# Altium PCB FU-AM-FU6861Q-B-002-HW-V3.0-20200620.PcbDoc (part 1 of 2)
Units mm, origin at the board's own origin, x right, y up, seen from the top; angles counter-clockwise.
Board outline 105.1 x 87.1 mm, 2 copper layers (TopLayer, BottomLayer); 151 components, 80 nets, 397 pads, 605 vias.
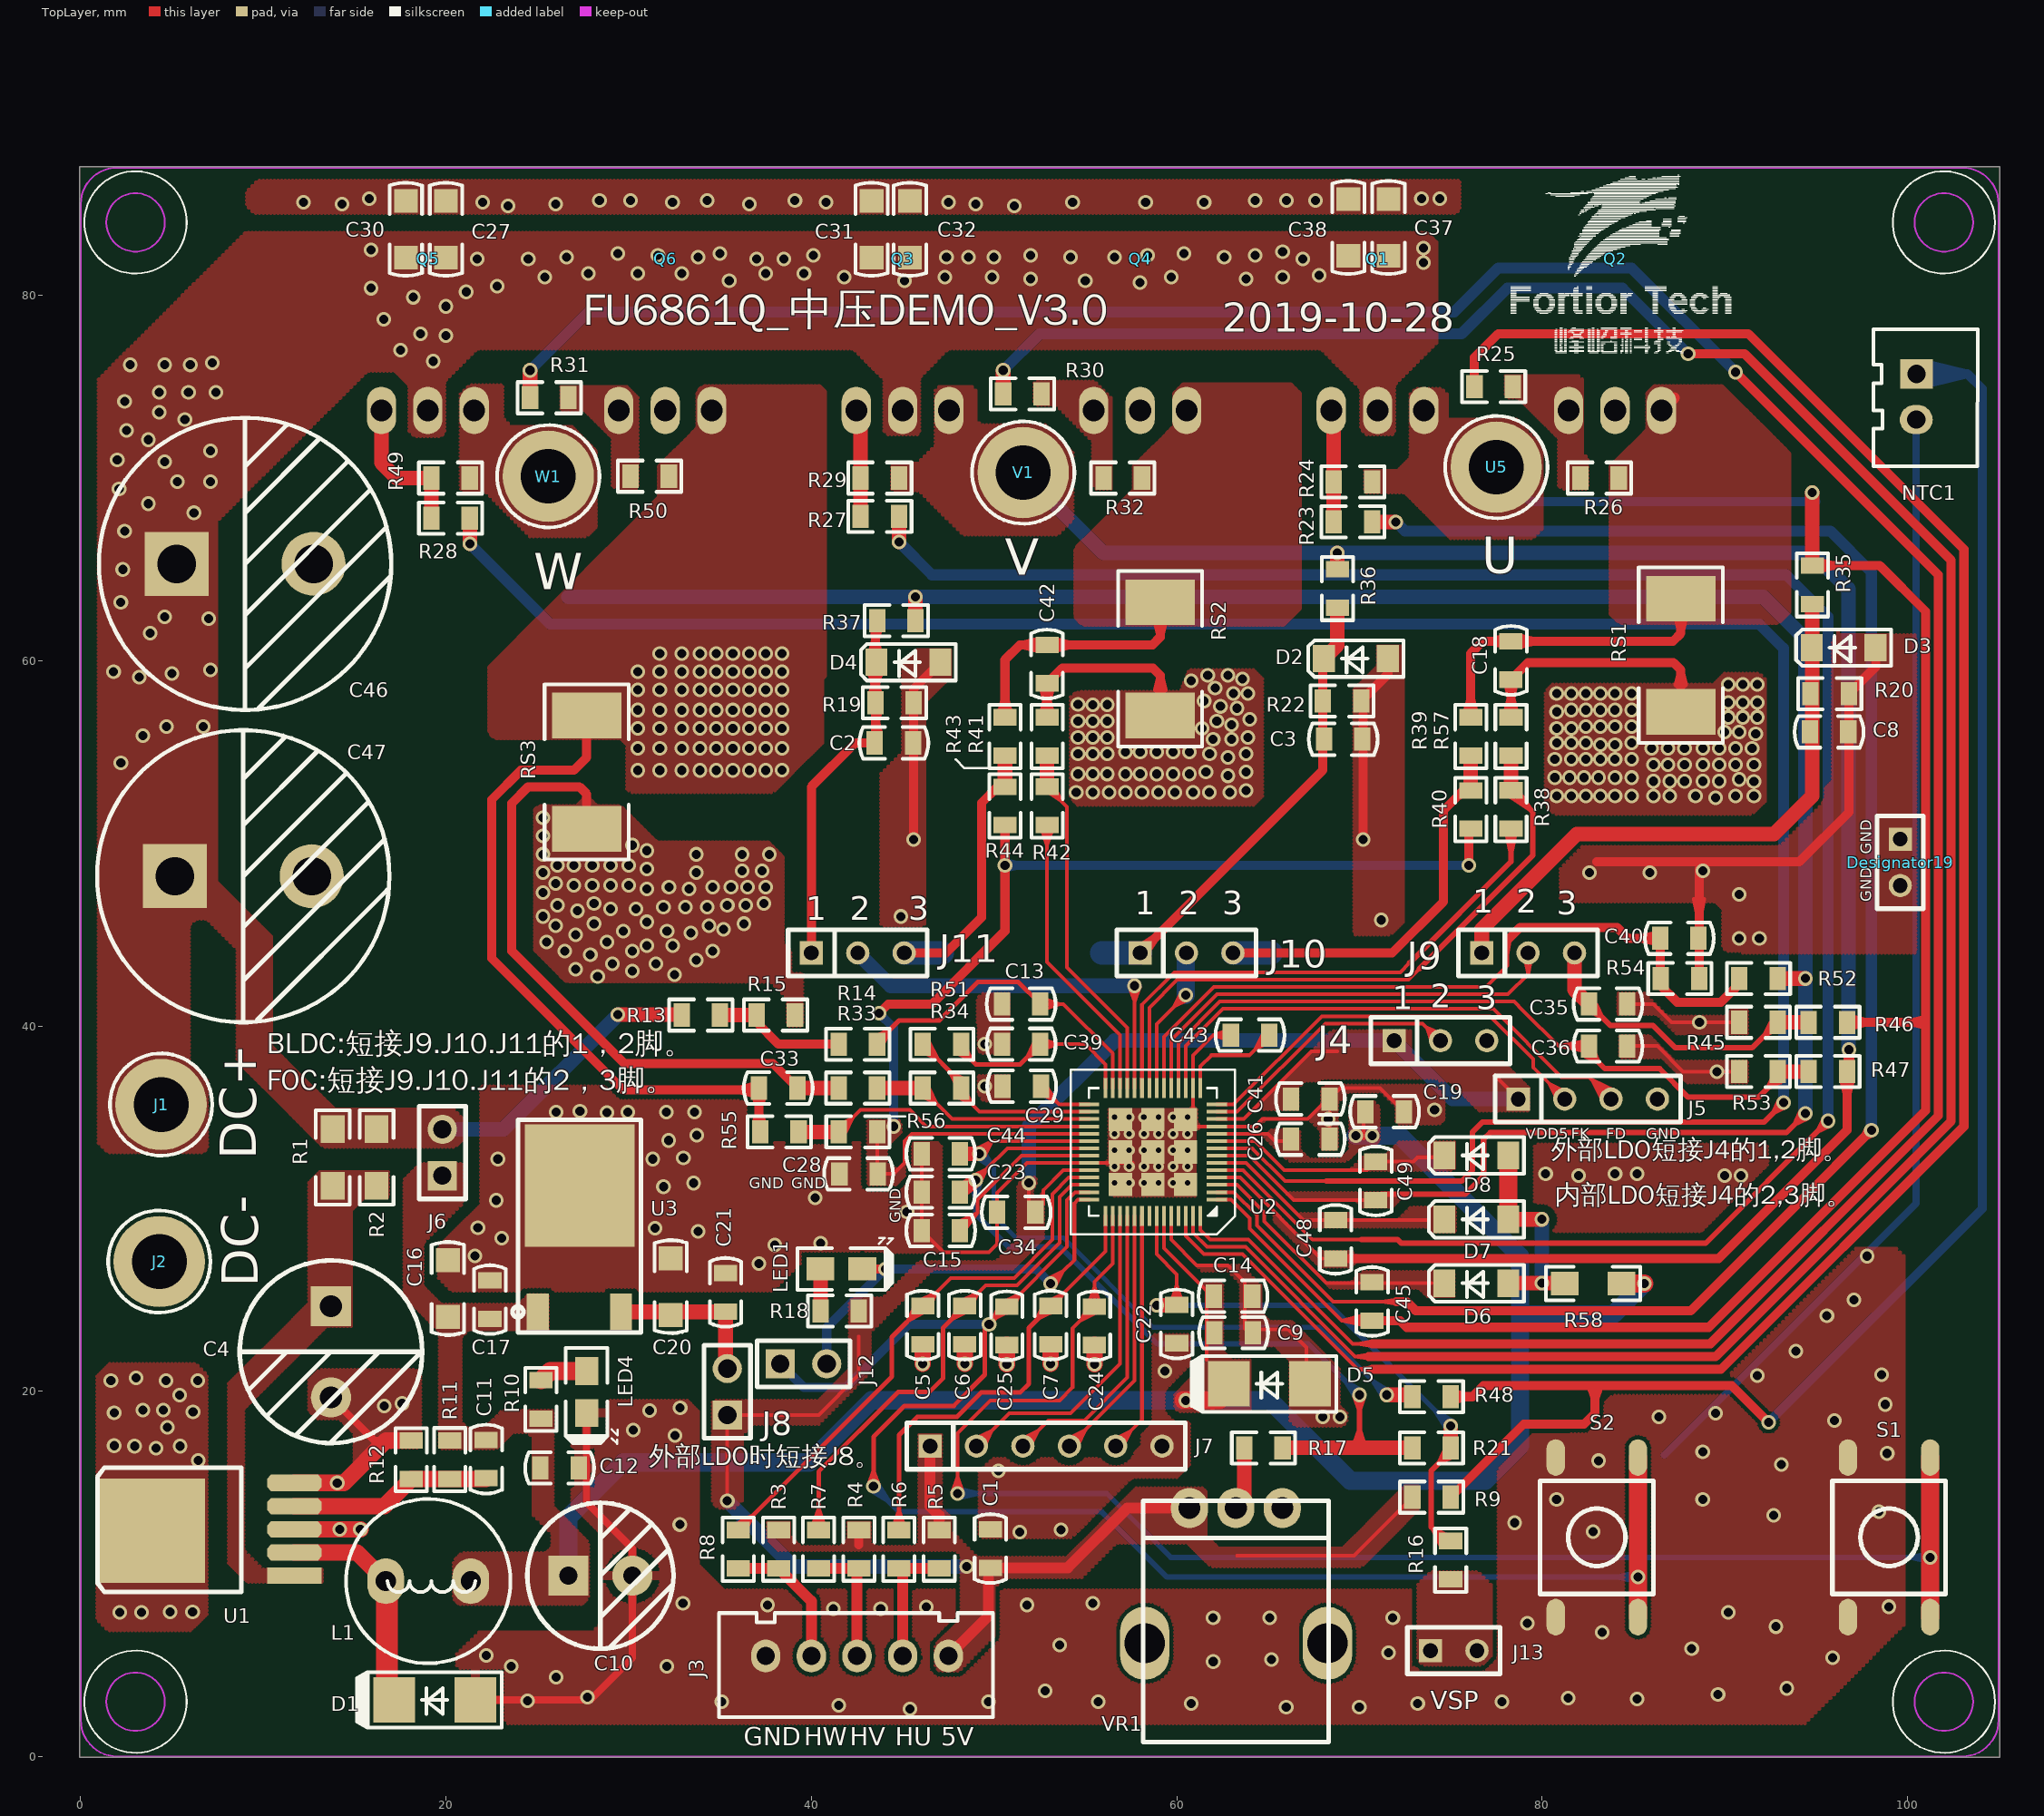
[diagram p0: TopLayer view]
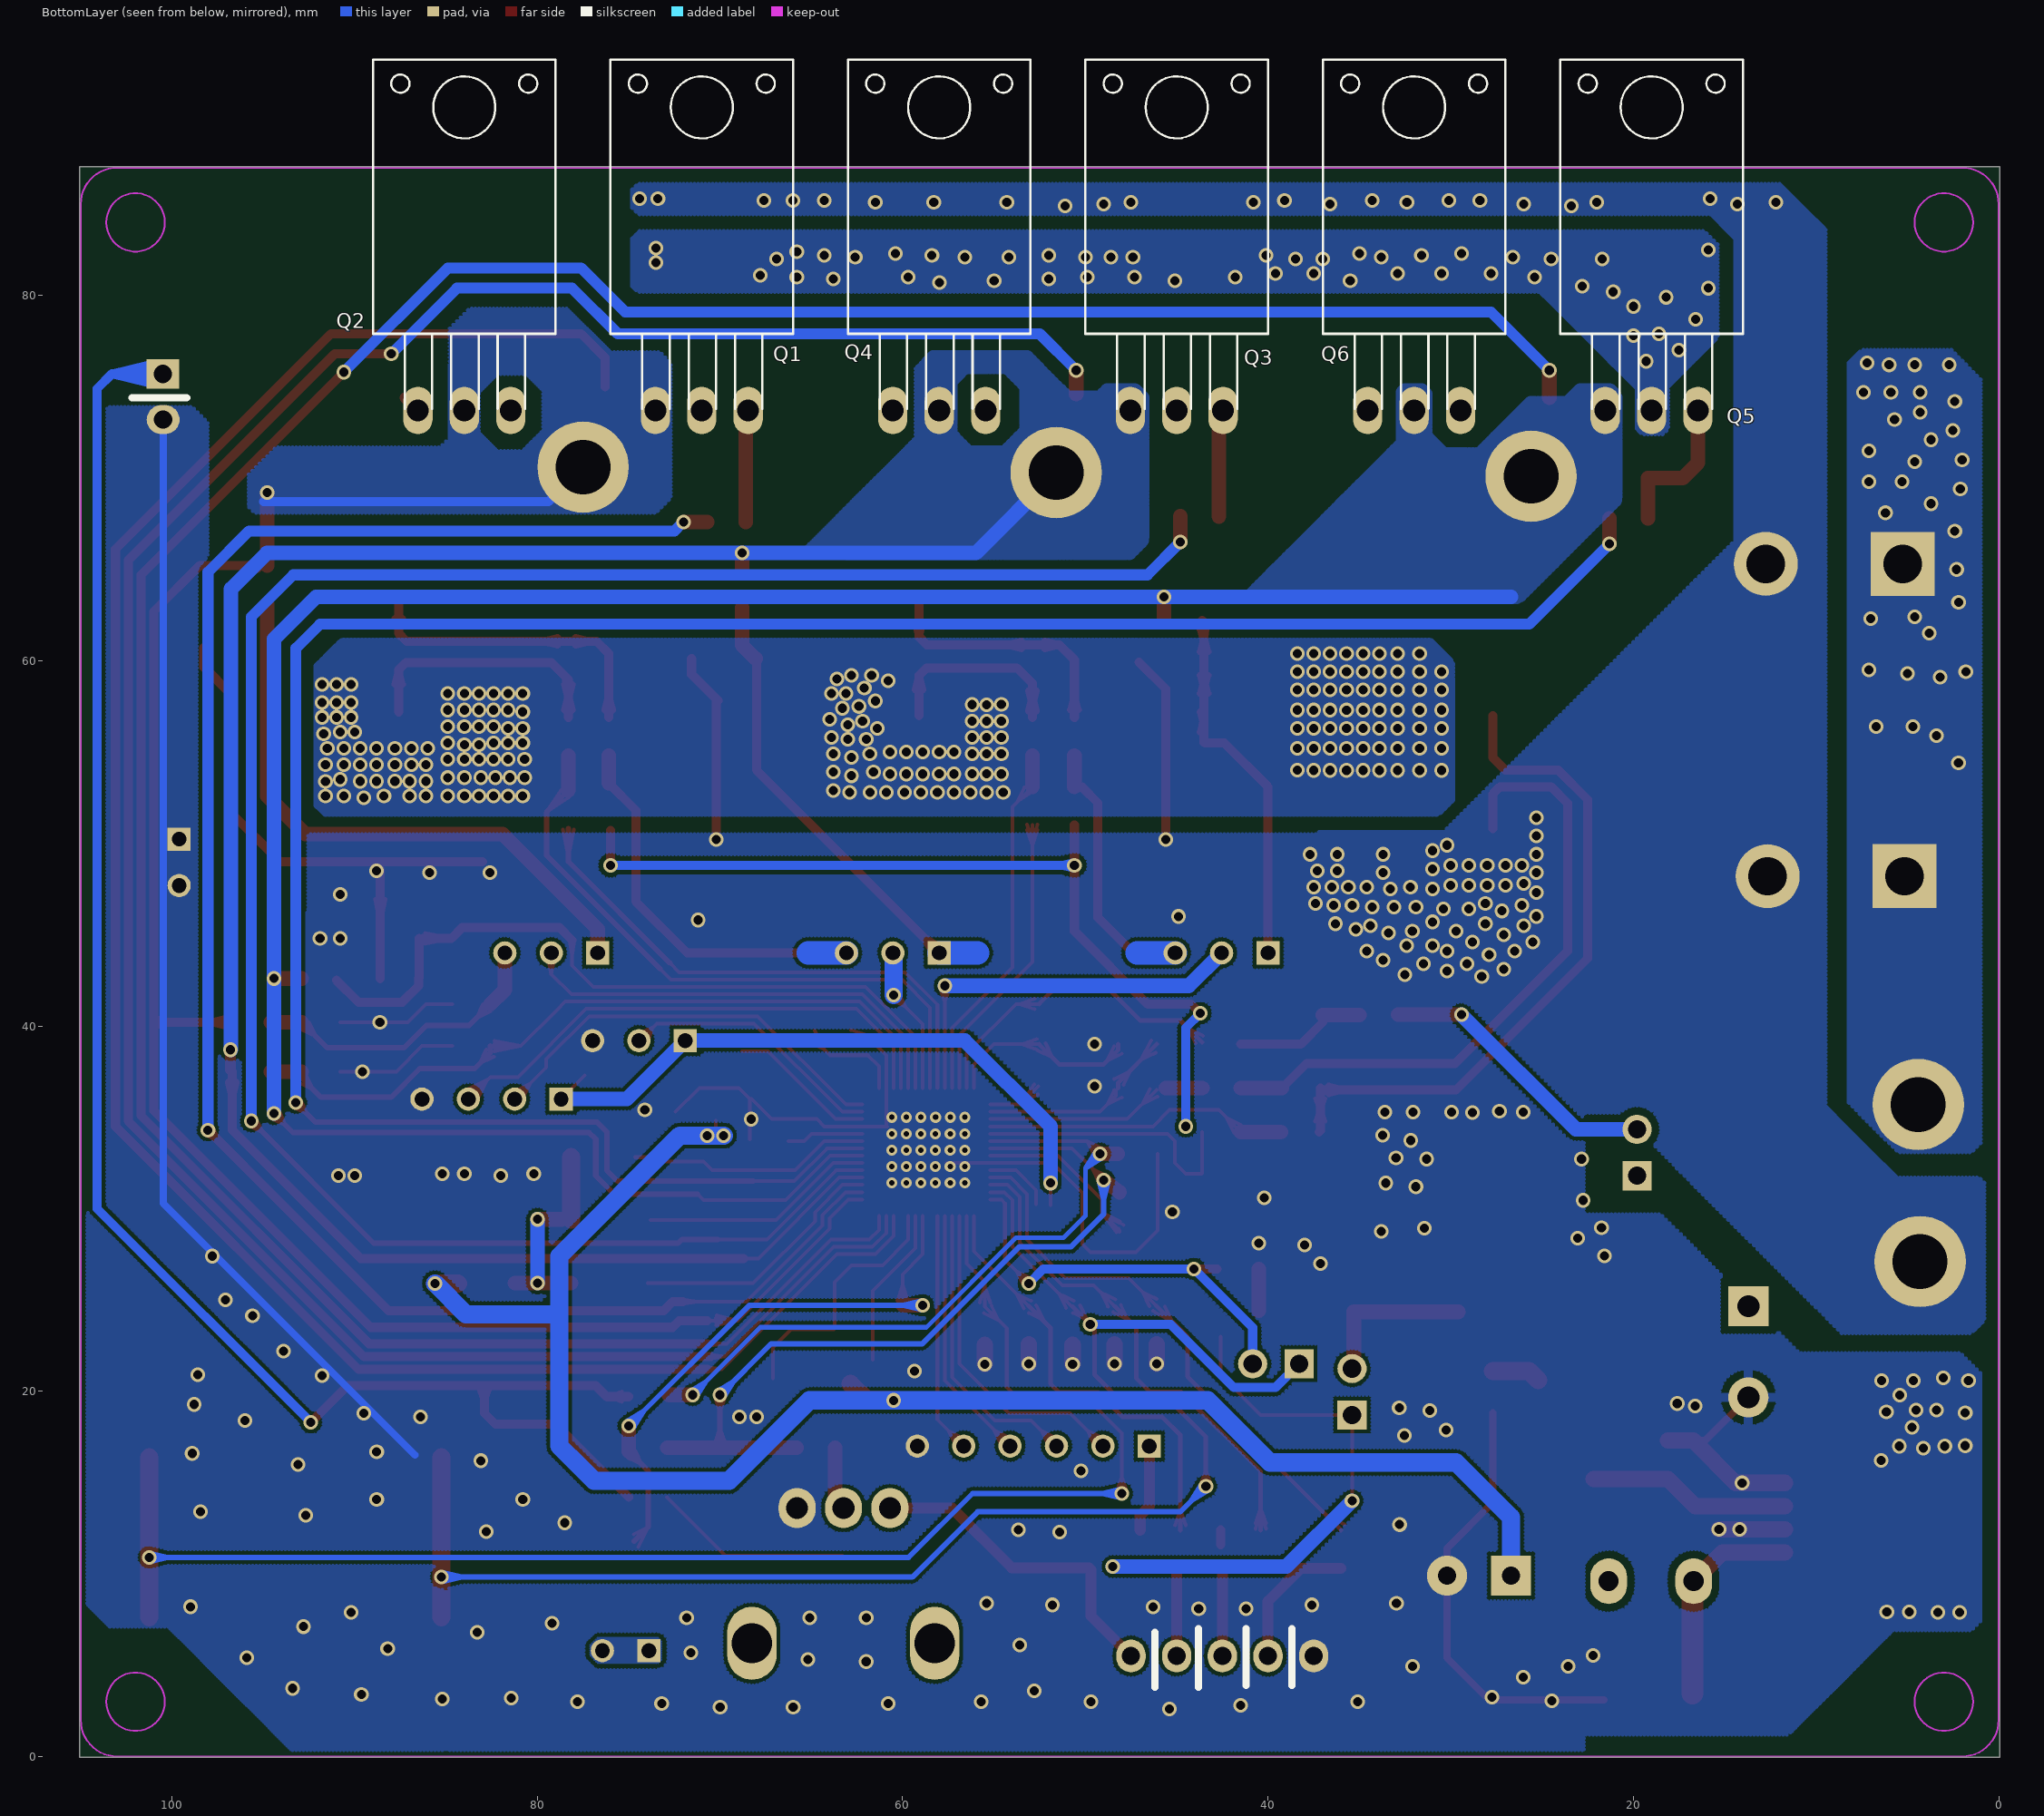
[diagram p1: BottomLayer view, seen from below]

## Layer stack, top to bottom
TopSolder: solder mask 0.0102, Solder Resist, Dk 3.5
TopLayer: signal copper 0.0356
Dielectric1: dielectric 0.32, FR-4, Dk 4.8
BottomLayer: signal copper 0.0356
BottomSolder: solder mask 0.0102, Solder Resist, Dk 3.5

## Board outline
-0.05,-0.05 105.05,-0.05 105.05,87.05 -0.05,87.05

## Design rules (kind name [scope] priority, off if disabled: settings)
AssemblyTestPointUsage [All] p1 off:
AssemblyTestpoint [All] p1 off: testpointundercomponent=TRUE minsize=1.016 maxsize=2.54 preferedsize=1.524 minholesize=0 maxholesize=1.016 preferedholesize=0.813 testpointgrid=0.025 usegrid=TRUE gridtolerance=0 allowsidetop=TRUE allowsidebottom=TRUE
Clearance [All] p1: gap=0.2 ignorepadtopadclearanceinfootprint=FALSE except(0: Arc-Hole Track-Hole SMDPad-Hole THPad-Hole Via-Hole Fill-Hole Poly-Hole Region-Hole Text-Hole)
ComponentClearance [All] p1 off: gap=0.254 collisioncheckmode=3 verticalgap=0.254 showdistances=FALSE
FabricationTestPointUsage TestPointUsage [All] p1 off: valid=0 allowmultiple=FALSE
FabricationTestpoint Testpoint [All] p1 off: side=3 testpointundercomponent=TRUE minsize=1.016 maxsize=2.54 preferedsize=1.524 minholesize=0.508 maxholesize=1.016 preferedholesize=0.813 testpointgrid=0.025 allowsidetop=TRUE allowsidebottom=TRUE usegrid=TRUE gridtolerance=0
FanoutControl Fanout_Small [All] p1 off: bgadir=Out bgaviamode=Centered fanoutstyle=Auto fanoutdirection=Alternating viagrid=0.025 // Protel DXP Scope 1 Expression Was: (CompPinCount < 5)   Fanout_Small (Default Rule)
FanoutControl Fanout_Default [All] p2: bgadir=Out bgaviamode=Centered fanoutstyle=Auto fanoutdirection=Alternating viagrid=0.025 // Fanout_Default (Default Rule)
FanoutControl Fanout_SOIC [All] p3 off: bgadir=Out bgaviamode=Centered fanoutstyle=Auto fanoutdirection=Alternating viagrid=0.025 // Protel DXP Scope 1 Expression Was: IsSOIC   Fanout_SOIC (Default Rule)
FanoutControl Fanout_BGA [All] p4 off: bgadir=Out bgaviamode=Centered fanoutstyle=Auto fanoutdirection=Alternating viagrid=0.025 // Protel DXP Scope 1 Expression Was: IsBGA   Fanout_BGA (Default Rule)
FanoutControl Fanout_LCC [All] p5 off: bgadir=Out bgaviamode=Centered fanoutstyle=Auto fanoutdirection=Alternating viagrid=0.025 // Protel DXP Scope 1 Expression Was: IsLCC   Fanout_LCC (Default Rule)
Height [All] p1 off: minheight=0 maxheight=25.4 prefheight=12.7
HoleSize [All] p1 off: absolutevalues=TRUE maxlimit=2.54 minlimit=0.025 maxpercent=80.000 minpercent=20.000
HoleToHoleClearance [All] p1 off: gap=0.254 allowstackedmicrovias=TRUE
LayerPairs [All] p1 off: enforce=TRUE
MinimumSolderMaskSliver [All] p1 off: minsoldermaskwidth=0.254
NetAntennae [All] p1 off: netantennaetolerance=0
PolygonConnect PolygonConnect_1 [isvia] p1: connectstyle=Direct reliefconductorwidth=0.508 reliefentries=4 polygonreliefangle="90 Angle" airgapwidth=0.254 // Protel DXP Scope 1 Expression Was: isvia
PolygonConnect [All] p2: connectstyle=Direct reliefconductorwidth=0.5 reliefentries=4 polygonreliefangle="90 Angle" airgapwidth=0.254
RoutingVias [All] p1: holewidth=0.406 width=0.711 viastyle="Through Hole" minholewidth=0.4 minwidth=0.7 maxholewidth=0.711 maxwidth=1.27
SilkToSilkClearance [All] p1 off: silktosilkclearance=0.254
SilkToSolderMaskClearance SilkscreenOverComponentPads [IsPad] p1 off: minsilkscreentomaskgap=0.254 clearancetoexposedcopper=TRUE
SolderMaskExpansion [All] p1: expansion=0.102 istentingtop=FALSE
Width [All] p1: maxlimit=5 minlimit=0.2 preferedwidth=0.5
12 further rules are at their usual default settings.

## Components (designator, comment, footprint, x,y, rotation, side; value= is the part's Value field where it differs from the comment)
C1 "0.1uF/25V" C0805 49.8,12.4 r270 top
C2 "1nF" C0805 43.5,55.5 r0 top
C3 "1nF" C0805 68.1,55.7 r0 top
C4 "100uF/100V" CE5-10/16 13.7,24.7 r270 top
C5 "2.2nF/16V" C0805 46.1,22.6 r90 top
C6 "2.2nF/16V" C0805 48.4,22.6 r90 top
C7 "2.2nF/16V" C0805 53.1,22.6 r90 top
C8 "1nF" C0805 94.7,56.1 r0 top
C9 "0.1uF/25V" C0805 62.1,23.2 r0 top
C10 "220uF/25V" CE3.5-8/12 26.7,9.9 r0 top
C11 "33nF" C0805 22.2,17.3 r270 top
C12 "0.1uF/25V" C0805 25.2,15.8 r0 top
C13 "0.1uF/16V" C0805 52.5,41.2 r180 top
C14 "10uF" C0805 64.1,25.2 r180 top
C15 "1uF" C0805 48.1,28.8 r180 top
C16 "10uF/25V" C1206 20.1,24.1 r90 top
C17 "0.1uF/25V" C0805 22.4,24 r90 top
C18 "100pF/16V" C0805 78.3,59 r90 top
C19 "10uF" C0805 72.4,35.3 r180 top
C20 "10uF/16V" C1206 32.3,24.2 r90 top
C21 "0.1uF/16V" C0805 35.3,24.4 r90 top
C22 "100pF" C0805 60,24.7 r270 top
C23 "0.1uF" C0805 48.1,30.9 r180 top
C24 "0.1uF" C0805 55.5,24.6 r270 top
C25 "0.1uF" C0805 50.7,24.6 r270 top
C26 "0.1uF/25V" C0805 66.3,33.8 r0 top
C27 "1uF/100V" C1206 20,82.1 r90 top
C28 "1uF" C0805 43.6,31.9 r180 top
C29 "0.1uF" C0805 50.5,36.7 r0 top
C30 "100nF/100V" C1206 17.8,82.1 r90 top
C31 "1uF/100V" C1206 43.3,82.1 r90 top
C32 "100nF/100V" C1206 45.4,82.1 r90 top
C33 "100pF" C0805 39.2,36.6 r180 top
C34 "1uF" C0805 50.2,29.8 r0 top
C35 "1nF" C0805 82.6,41.2 r0 top
C36 "1nF" C0805 82.6,38.9 r0 top
C37 "100nF/100V" C1206 71.6,82.2 r90 top
C38 "1uF/100V" C1206 69.4,82.2 r90 top
C39 "4.7uF" C0805 52.5,39 r180 top
C40 "1nF" C0805 86.5,44.8 r0 top
C41 "1uF" C0805 66.3,36 r0 top
C42 "100pF/16V" C0805 52.9,58.8 r90 top
C43 "1uF" C0805 63,39.5 r0 top
C44 "0.1uF/25V" C0805 48.1,33 r180 top
C45 "10uF/25V" C0805 70.7,23.9 r90 top
C46 "100uF/100V" CE7.5-16/25 9,65.3 r0 top
C47 "100uF/100V" CE7.5-16/25 8.9,48.2 r0 top
C48 "10uF/25V" C0805 68.7,27.3 r90 top
C49 "10uF/25V" C0805 70.899,30.5 r90 top
D1 "SS110" SMA 21.6,3.1 r180 top
D2 "ZMM5.1" SOD-123#1 71.6,60.1 r180 top
D3 "ZMM5.1" SOD-123#1 98.3,60.7 r180 top
D4 "ZMM5.1" SOD-123#1 47.1,59.9 r180 top
D5 "SMAJ18CTVS18V)" SMA 67.3,20.4 r180 top
D6 "IN4148W" SOD-123#2 78.2,25.9 r180 top
D7 "IN4148W" SOD-123#2 78.2,29.4 r180 top
D8 "IN4148W" SOD-123#2 78.2,32.9 r180 top
Designator19 "Comment" SIP2-2.54#1 99.613,50.232 r270 top
J1 "100V" TP 4.4,35.7 r0 top
J2 "GND" TP 4.3,27.1 r0 top
J3 "HALL" XH-5P-2.54 47.5,5.5 r180 top
J4 "CON3" SIP3-2.54 71.9,39.2 r0 top
J5 "JTAG" SIP4-2.54 78.7,36 r0 top
J6 "VDD15" SIP2-2.54#2 19.8,31.8 r90 top
J7 "CON6" sip6-2.54 46.5,17 r0 top
J8 "VDD5" SIP2-2.54#2 35.4,18.7 r90 top
J9 "CON3" SIP3-2.54 76.7,44 r0 top
J10 "CON3" SIP3-2.54 58,44 r0 top
J11 "CON3" SIP3-2.54 40,44 r0 top
J12 "CON2" SIP2-2.54#2 38.3,21.5 r0 top
J13 "VSP" SIP2-2.54#1 73.9,5.8 r0 top
L1 "100uH/1A" L4.5-9 16.7,9.6 r0 top
LED1 "RED" LED0805 40.5,26.7 r0 top
LED4 "GREEN" LED0805 27.7,21.1 r270 top
NTC1 "10K/1%" XH-2P-2.54 100.5,75.7 r270 top
Q1 "150A/100V" TO-220AB-W 71,82 r0 top locked
Q2 "150A/100V" TO-220AB-W 84,82 r0 top locked
Q3 "150A/100V" TO-220AB-W 45,82 r0 top locked
Q4 "150A/100V" TO-220AB-W 58,82 r0 top locked
Q5 "150A/100V" TO-220AB-W 19,82 r0 top locked
Q6 "150A/100V" TO-220AB-W 32,82 r0 top locked
R1 "200R/1%" R1206 13.8,32.8 r270 top
R2 "200R/1%" R1206 16.2,32.8 r270 top
R3 "3.3K" R0805 38.2,10.3 r90 top
R4 "3.3K" R0805 42.6,10.3 r90 top
R5 "3.3K" R0805 47,10.3 r90 top
R6 "100R" R0805 44.8,12.4 r270 top
R7 "100R" R0805 40.4,12.4 r270 top
R8 "100R" R0805 36,12.4 r270 top
R9 "10K/1%" R0805 72.9,14.2 r0 top
R10 "10K/1%" R0805 25.2,18.5 r90 top
R11 "30K" R0805 20.2,15.2 r90 top
R12 "3.3K" R0805 18.1,17.3 r270 top
R13 "20K/1%" R0805 32.9,40.6 r0 top
R14 "1K" R0805 43.6,39 r180 top
R15 "1K/1%" R0805 37,40.6 r0 top
R16 "100R" R0805 75,9.7 r90 top
R17 "1K" R0805 63.7,16.9 r0 top
R18 "3K/1%" R0805 42.6,24.4 r180 top
R19 "1K" R0805 43.5,57.7 r0 top
R20 "1K" R0805 94.7,58.2 r0 top
R21 "1K" R0805 75,16.9 r180 top
R22 "1K" R0805 68,57.8 r0 top
R23 "10R" R0805 70.7,67.6 r180 top
R24 "47K" R0805 70.7,69.8 r180 top
R25 "10R" R0805 76.3,75 r0 top
R26 "47K" R0805 84.2,70 r180 top
R27 "10R" R0805 44.8,67.9 r180 top
R28 "10R" R0805 21.3,67.8 r180 top
R29 "47K" R0805 44.8,70 r180 top
R30 "10R" R0805 50.5,74.6 r0 top
R31 "10R" R0805 24.6,74.4 r0 top
R32 "47K" R0805 58.1,70 r180 top
R33 "2K/1%" R0805 43.6,36.6 r180 top
R34 "20K/1%" R0805 48.2,36.6 r180 top
R35 "20K" R0805 94.8,63.1 r90 top
R36 "20K" R0805 68.8,62.9 r90 top
R37 "20K" R0805 43.6,62.2 r0 top
R38 "20K/1%" R0805 78.3,50.8 r90 top
R39 "2K/1%" R0805 76.1,54.8 r90 top
R40 "20K/1%" R0805 76.1,52.9 r270 top
R41 "2K/1%" R0805 52.9,54.8 r90 top
R42 "20K/1%" R0805 52.9,51 r90 top
R43 "2K/1%" R0805 50.6,54.8 r90 top
R44 "20K/1%" R0805 50.6,53.1 r270 top
R45 "1.5K" R0805 92.9,40.2 r180 top
R46 "30K" R0805 94.6,40.2 r0 top
R47 "30K" R0805 94.6,37.5 r0 top
R48 "1K/1%" R0805 75,19.7 r180 top
R49 "47K" R0805 21.3,70 r180 top
R50 "47K" R0805 32.2,70.1 r180 top
R51 "20K/1%" R0805 48.2,39 r180 top
R52 "30K" R0805 90.8,42.6 r0 top
R53 "1.5K" R0805 92.9,37.5 r180 top
R54 "1.5K" R0805 86.5,42.6 r0 top
R55 "2K/1%" R0805 39.3,34.2 r180 top
R56 "20K/1%" R0805 41.5,34.2 r0 top
R57 "2K/1%" R0805 78.3,54.8 r90 top
R58 "10R" R1206 82.8,25.9 r0 top
RS1 "0R005/1% 2W" R2512 87.6,57.2 r90 top
RS2 "0R005/1% 2W" R2512 59.1,57 r90 top
RS3 "0R002/1% 2W" R2512 27.7,50.8 r90 top
S1 "SW SPST" SW-6/6 99,12 r90 top
S2 "SW SPST" SW-6/6 83,12 r90 top
U1 "XL7015" TO-252-5L 11.7,9.9 r90 top
U2 "FU6861Q" QFN56 62.2,30.5 r180 top
U3 "78M05" TO-252-3L 27.3,27.8 r0 top
U5 "U" TP 77.5,70.6 r0 top
V1 "V" TP 51.6,70.3 r0 top
VR1 "" VR6 60.7,13.6 r0 top
W1 "W" TP 25.6,70.1 r0 top

## Footprints (in the part's own frame and the unit in brackets; to place one, negate y for a bottom-side part, rotate by r counter-clockwise, add the part's x,y. Pads: shape width x height; smd on the part's side, far side on the other; paste and mask are expansions set on the pad)
C0805 [mm]
  rect 0.9x1.27 smd mask+0.051: 1(-0.034,0) 2(2.066,0)
  silkscreen extent -0.87,-0.86 2.9,0.86
C1206 [mm]
  rect 1.3x1.3 smd mask+0.051: 1(-0.026,0) 2(3.074,0)
  silkscreen extent -1.02,-0.89 4.07,0.89
CE3.5-8/12 [mm]
  rect 2.2x2.2 hole 1: 1(0,0)
  round 2.2 hole 1: 2(3.5,0)
  silkscreen extent -2.25,-4 5.75,4
CE5-10/16 [mm]
  rect 2.2x2.2 hole 1.2: 1(0.04,0)
  round 2.2 hole 1.2: 2(5.04,0)
  silkscreen extent -2.46,-5 7.54,5
CE7.5-16/25 [mm]
  rect 3.5x3.5 hole 2.1: 1(-3.75,0)
  round 3.5 hole 2.1: 2(3.75,0)
  silkscreen extent -8,-8 8,8
L4.5-9 [mm]
  oval 2x2.5 hole 1.1: 1(0,0) 2(4.65,0)
  silkscreen extent -2.17,-4.5 6.82,4.5
LED0805 [mil]
  rect 60x50 smd mask+2: 1(0,0) 2(90,0)
  silkscreen extent -50,-45 156,67
QFN56 [mm]
  rect 1.27x1.27 smd: 0(1.722,-0.822) 0(1.722,-4.378) 0(1.722,-2.6) 0(3.5,-2.6) 0(3.5,-0.822) 0(3.5,-4.378) 0(5.278,-2.6) 0(5.278,-0.822) 0(5.278,-4.378)
  rect 1.1x0.2 smd: 1(0,0) 2(0,-0.4) 3(0,-0.8) 4(0,-1.2) 5(0,-1.6) 6(0,-2) 7(0,-2.4) 8(0,-2.8) 9(0,-3.2) 10(0,-3.6) 11(0,-4) 12(0,-4.4) 13(0,-4.8) 14(0,-5.2) 29(7,-5.2) 30(7,-4.8) 31(7,-4.4) 32(7,-4) 33(7,-3.6) 34(7,-3.2) 35(7,-2.8) 36(7,-2.4) 37(7,-2) 38(7,-1.6) 39(7,-1.2) 40(7,-0.8) 41(7,-0.4) 42(7,0)
  rect 0.2x1.1 smd: 15(0.9,-6.1) 16(1.3,-6.1) 17(1.7,-6.1) 18(2.1,-6.1) 19(2.5,-6.1) 20(2.9,-6.1) 21(3.3,-6.1) 22(3.7,-6.1) 23(4.1,-6.1) 24(4.5,-6.1) 25(4.9,-6.1) 26(5.3,-6.1) 27(5.7,-6.1) 28(6.1,-6.1) 43(6.1,0.9) 44(5.7,0.9) 45(5.3,0.9) 46(4.9,0.9) 47(4.5,0.9) 48(4.1,0.9) 49(3.7,0.9) 50(3.3,0.9) 51(2.9,0.9) 52(2.5,0.9) 53(2.1,0.9) 54(1.7,0.9) 55(1.3,0.9) 56(0.9,0.9)
  silkscreen extent -1,-7.1 8,1.9
R0805 [mm]
  rect 0.9x1.27 smd: 1(0.001,-0.001) 2(2.101,-0.001)
  silkscreen extent -0.68,-0.86 2.79,0.86
R1206 [mm]
  rect 1.5x1.3 smd: 1(-1.55,0) 2(1.55,0)
  silkscreen extent -2.58,-0.93 2.58,0.92
R2512 [mm]
  rect 2.5x3.8 smd mask+0.051: 1(0,0) 2(6.196,0)
  silkscreen extent -1.69,-2.29 7.91,2.31
SIP2-2.54#1 [mil]
  rect 50x50 hole 32: 1(0,0)
  round 50 hole 32: 2(100,0)
  silkscreen extent -50,-50 150,50
SIP2-2.54#2 [mil]
  rect 62.99x62.99 hole 39.37: 1(0,0)
  round 62.99 hole 39.37: 2(100,0)
  silkscreen extent -50,-50 150,50
SIP3-2.54 [mil]
  rect 50x50 hole 32: 1(0,0)
  round 50 hole 32: 2(100,0) 3(200,0)
  silkscreen extent -50,-50 250,50
SIP4-2.54 [mil]
  rect 50x50 hole 32: 1(0,0)
  round 50 hole 32: 2(100,0) 3(200,0) 4(300,0)
  silkscreen extent -50,-50 350,50
sip6-2.54 [mil]
  rect 50x50 hole 32: 1(0,0)
  round 50 hole 32: 2(100,0) 3(200,0) 4(300,0) 5(400,0) 6(500,0)
  silkscreen extent -50,-50 550,50
SMA [mil]
  rect 90x98 smd mask+2: 1(0,0) 2(175,0)
  silkscreen extent -57,-60 255,60
SOD-123#1 [mm]
  rect 1.2x1.5 smd: 1(0.04,-0.013) 2(3.54,-0.013)
  silkscreen extent -0.81,-1.01 4.39,0.99
SOD-123#2 [mm]
  rect 1.2x1.5 smd: A(0.04,-0.013) K(3.54,-0.013)
  silkscreen extent -0.81,-1.01 4.39,0.99
SW-6/6 [mm]
  oval 2x1 smd: 1(-4.37,-2.25) 1(4.37,-2.25) 2(-4.37,2.25) 2(4.37,2.25)
  silkscreen extent -3.1,-3.1 3.1,3.1
TO-220AB-W [mm]
  round 0.5 on Top Overlay: 0(0,8.3)
  oval 1.6x2.6 hole 1.2: 1(-2.54,-8.3) 2(0,-8.3) 3(2.54,-8.3)
TO-252-3L [mm]
  rect 6x6.7 smd: GND(0.02,3.457)
  rect 1.2x2 smd: IN(-2.28,-3.457) OUT(2.28,-3.457)
  silkscreen extent -3.66,-4.58 3.36,7.06
TO-252-5L [mm]
  rect 0.9x3 smd: 1(0,0)
  oct 0.9x3 smd: 2(1.27,0) 3(2.54,0) 4(3.81,0) 5(5.08,0)
  rect 5.715x6 smd: 3(2.469,7.898)
  silkscreen extent -0.89,2.91 5.91,10.79
TP [mm]
  round 5 hole 3: 1(0,0)
  silkscreen extent -2.8,-2.8 2.8,2.8
VR6 [mm]
  oval 2.032x2.2 hole 1.2: 1(0,0) 3(5.08,0) W(2.54,0)
  oval 2.7x4 hole 2.2: 4(7.55,-7.4) 5(-2.45,-7.4)
  silkscreen extent -2.54,-12.81 7.62,0.4
XH-2P-2.54 [mm]
  rect 1.6x1.8 hole 1: 1(0,0)
  oval 1.6x1.8 hole 1: 2(2.5,-0.01)
  silkscreen extent -2.44,-2.37 5.06,3.35
XH-5P-2.54 [mm]
  oval 1.6x1.8 hole 1: 1(0,0) 2(2.5,-0.01) 3(5,0) 4(7.5,0) 5(10,0)
  silkscreen extent -2.44,-2.35 12.56,3.35

## Part data
C1 C2 C3 C5 C6 C7 C8 C11 C12 C13 C14 C15 C17 C18 C19 C24 C25 C27 C28 C29 C30 C31 C32 C33 C34 C35 C36 C37 C38 C39 C40 C41 C42 C43 C46 C47: library part CAP, "Capacitor"
C4 C16: library part ELECTRO1, "Electrolytic Capacitor"
C9 C22 C23 C26 C44: library part CAP-CC, "Capacitor"
C10: library part "Cap Pol1", "Polarized Capacitor (Radial)"
C20: library part ELECTRO1
C21 C45 C48 C49: library part CAP-CC(SMD), "Capacitor"
D1: library part DIODE, "Diode"
D2 D3 D4: library part ZENER3, "Zener Diode"
D5: library part TVS1, "Zener Diode"
D6 D7 D8: library part 1N4004, "Diode"
J1 J2 U5 V1 W1: library part CON1, "Connector"
J3: library part CON5, "Connector"
J4 J7 J9 J10 J11 J12: "Connector"
J5: library part CON4, "Connector"
J6 J8: library part CON2, "Connector"
L1: library part INDUCTOR
LED1 LED4: library part LED
NTC1 R1 R2 R3 R4 R5 R6 R7 R8 R9 R10 R11 R12 R13 R14 R15 R16 R17 R18 R21 R23 R24 R25 R26 R27 R28 R29 R30 R31 R32 R33 R34 R38 R39 R40 R41 R42 R43 R44 R48 R49 R50 R51 R55 R56 R57 R58 RS1 RS2 RS3: library part RES(SMD)
Q1 Q2 Q3 Q4 Q5 Q6: library part "MOSFET N(GDS)"
R19 R20 R22 R35 R36 R37 R45 R46 R47 R52 R53 R54: library part RES-SMD, "RES"
VR1: library part RV-3296, "Potentiometer"

## Via types
v1: diameter 0.8, hole 0.5, TopLayer to BottomLayer, tented both sides, 575 vias
v2: diameter 0.6, hole 0.3, TopLayer to BottomLayer, tented both sides, 30 vias

## Nets (pads, with @x,y where several pads share a name; then routed paths per layer and width w, separated by ;. In a path a pad name is that pad's centre, name@x,y a point inside that pad or via, vN(x,y) a via of type N, cw(c..) or ccw(c..) an arc to the next point about the centre after c; other vN are vias at no path point)
+5V: C20.1 C21.1 J8.2 U3.OUT | length 8.7
  TopLayer w0.8: U3.OUT@29.58,24.343 C21.1@35.277,24.343 ; J8.2@35.3,21.34 C21.1@35.3,24.366
+12V: C9.1 C10.1 C11.1 C12.1 C14.2 C16.1 C17.1 C19.2 C26.1 D5.2 J6.1 L1.2 R10.1 R11.2 R58.2 U2.10 U2.51 U3.IN | length 113.9
  TopLayer w0.2: U2.51@59.3,29.6 59.3,27.834 61.634,25.5 61.634,21.721 ; U2.10@62.2,34.1 65,34.1 65.4,33.7 C26.1@66.266,33.7 ; 70.234,33.834 C19.2@70.234,34.8
  TopLayer w1: v1@60.377,19.507 D5.2@62.332,19.507 ; D5.2@61.955,19.5 D5.2@62.855,20.4 ; R58.2@84.35,25.9 v1(85.6,25.9)
  BottomLayer w1: C10.1@26.7,9.9 26.7,13.1 29.7,16.1 37.2,16.1 ; 32.9,16.1 37.2,16.1 ; v1(69.8,34) v1(70.7,34) 72.2,34 78.8,27.4 78.8,24.2 ; 78.3,16.5 77.697,15.897 ; v1(85.6,25.9) 83.9,24.2 78.8,24.2 ; 37.2,16.1 39.9,16.1 43.3,19.5 v1(60.503,19.5) 65.1,19.5 69.5,15.1 76.9,15.1 77.697,15.897 ; 77.697,15.897 78.8,17 78.8,24.2
+80V: C27.1 C30.1 C31.1 C32.1 C37.1 C38.1 C46.1 C47.1 J1.1 J6.2 Q1.2 Q3.2 Q5.2 R1.1 R2.1 R13.1 | length 15.7
  TopLayer w0.8: v1(29.413,40.615) R13.1@32.886,40.615
  BottomLayer w0.8: J6.2@19.8,34.34 23.139,34.34 v1(29.413,40.615)
  other v1: 2.2,54.4 3.4,55.9 4.7,56.4 6.7,56.4 3.197,59.1 4.997,59.3 1.8,59.397 7.1,59.5 3.8,61.5 7,62.3 4.6,62.4 2.197,63.2 2.3,64.997 2.4,67.1 6.197,68.1 3.7,68.6 2.1,69.4 5.3,69.8 7.1,69.797 4.6,70.9 2,71 7.1,71.5 3.7,72.1 2.5,72.6 5.7,73.2 4.3,73.6 2.4,74.2 4.3,74.7 5.9,74.7 7.4,74.7 2.7,76.2 4.6,76.2 6,76.2 7.2,76.3 19.3,76.397 17.5,76.997 19.997,77.8 18.597,77.9 16.597,78.7 19.997,79.4 18.197,79.9 21.1,80.197 15.9,80.397 22.797,80.5 57.997,80.7 35.5,80.797 45.1,80.797 54.997,80.8 51.997,80.9 63.797,80.9 25.4,80.997 41.8,80.997 47.3,80.997 49.9,80.997 59.7,80.997 65.8,80.997 67.797,81.1 27.8,81.197 30.5,81.197 32.9,81.197 37.5,81.197 39.597,81.2 73.5,81.797 21.7,81.997 24.5,81.997 36.997,82 38.5,81.997 66.9,81.997 26.597,82.1 33.797,82.1 47.397,82.1 48.597,82.1 49.997,82.1 54.197,82.1 56.597,82.1 62.597,82.1 31.6,82.197 40.1,82.197 52,82.197 58.4,82.197 64.3,82.197 29.397,82.3 34.997,82.3 60.397,82.3 65.797,82.4 15.9,82.5 73.5,82.597
AD3: C39.1 R51.1 U2.28 | length 16.1
  TopLayer w0.2: R51.1@48.016,38.476 48.813,38.087 R51.1@48.424,38.884 ; 51.791,38.257 C39.1@52.588,38.646 ; 51.791,38.257 C39.1@52.18,39.054 ; C39.1@52.534,39 55,39 56.1,37.9 U2.28@56.1,36.6 ; C39.1@52.662,38.712 53.5,39 C39.1@52.662,39.288
  TopLayer w0.25: R51.1@48.199,39.001 48.199,38.701 49,37.9 51.434,37.9 C39.1@52.534,39
AMP0M: R33.1 R34.2 U2.31 | length 13.5
  TopLayer w0.2: R34.2@46.054,36.138 46.851,35.75 R34.2@46.462,36.546 ; R34.2@46.098,36.502 47.7,34.9 U2.31@55.2,34.9
  TopLayer w0.8: R33.1@43.598,36.601 45.598,36.601
AMP0O: R34.1 R51.2 U2.30 | length 16.6
  TopLayer w0.2: R51.2@46.151,38.541 46.947,38.152 R51.2@46.4,39.2 ; 47.521,37.578 R34.1@47.91,36.781 ; 47.621,37.478 R34.1@48.418,37.089 ; R34.1@48.007,36.085 48.804,35.696 R34.1@48.415,36.493 ; R34.1@48.199,36.601 48.333,36.466 48.333,36.167 49.2,35.3 U2.30@55.2,35.3
  TopLayer w0.25: R51.2@46.098,39.001 48.199,36.901 R34.1@48.199,36.601
AMP0P: R55.1 R56.1 U2.32 | length 18.5
  TopLayer w0.2: R56.1@41.466,34.571 42.262,34.96 R56.1@41.873,34.163 ; R56.1@41.501,34.199 42.702,35.4 45.4,35.4 46.3,34.5 U2.32@55.2,34.5
  TopLayer w0.8: R55.1@39.298,34.201 R56.1@41.5,34.201
AMP1M: R38.2 R57.1 U2.22 | length 37.8
  TopLayer w0.2: U2.22@58.5,36.6 58.5,41 60.035,42.535 72.692,42.535 73.278,43.122 ; R38.2@78.27,52.518 79.5,51.702 R38.2@78.683,52.931
  TopLayer w0.3: 73.278,43.122 79.5,49.343 79.5,51.702 R38.2@78.301,52.901
  TopLayer w0.8: R38.2@78.301,52.901 R57.1@78.301,54.801
AMP1O: R38.1 U2.23 | length 40.5
  TopLayer w0.2: U2.23@58.1,36.6 58.1,41.166 59.869,42.935 72.235,42.935 72.75,43.45 78.2,48.9 ; R38.1@78.008,50.747 78.301,49.3 R38.1@78.593,50.747
  TopLayer w0.3: 72.75,43.45 78.301,49.001 R38.1@78.301,50.801
AMP1P: J10.3 R39.1 R40.1 | length 23.4
  TopLayer w0.5: J10.3@63.08,44 71.8,44 74.6,46.8 74.6,51.8 R40.1@76.101,53.301
  TopLayer w0.8: R40.1@76.101,53.301 R39.1@76.101,54.801
  BottomLayer w1.3: J10.3@63.08,44 65.167,44
AMP2M: R41.1 R42.2 U2.25 | length 22
  TopLayer w0.2: R42.2@52.8,52.9 53.723,52.279 R42.2@53.335,53.075 ; R42.2@52.901,53.101 54,52.002 54,43.2 57.3,39.9 U2.25@57.3,36.6
  TopLayer w0.8: R42.2@52.901,53.101 R41.1@52.901,54.801
AMP2O: R42.1 U2.26 | length 19.6
  TopLayer w0.2: R42.1@52.612,50.738 52.901,49.9 ; R42.1@52.612,51.038 52.901,50.2 R42.1@53.189,51.038 ; 52.901,49.9 R42.1@53.189,50.738 ; R42.1@52.901,51.001 52.901,43.499 56.9,39.5 U2.26@56.9,36.6
AMP2P: J11.3 R43.1 R44.1 | length 16.8
  TopLayer w0.5: J11.3@45.08,44 47.378,44 49.327,45.949 49.327,52.222 50.203,53.098 R44.1@50.599,53.098
  TopLayer w0.8: R44.1@50.599,53.098 R43.1@50.599,54.8
  BottomLayer w1.3: J11.3@45.08,44 47.167,44
CMP0M: C40.1 R52.1 R54.1 U2.20 | length 46.3
  TopLayer w0.2: U2.20@59.3,36.6 59.3,39.397 62.038,42.135 76.935,42.135 78.1,43.3 78.1,43.866 ; 77.967,44.653 78.1,43.866 ; 78.1,44.343 78.1,44.7 78.1,43.866 ; 78.221,44.628 78.1,43.866 ; C40.1@86.147,44.508 84.7,44.8 C40.1@86.147,45.092 ; C40.1@86.266,44.8 C40.1@86.466,44.8
  TopLayer w0.5: 78.1,44.7 78.8,45.4 84.1,45.4 84.7,44.8 C40.1@86.266,44.8 ; R54.1@86.466,42.635 C40.1@86.466,44.8 ; R54.1@86.501,42.599 86.501,42.199 87.4,41.3 89.8,41.3 R52.1@91,42.5
CMP0P: C35.1 J9.3 R45.1 R46.1 | length 20.3
  TopLayer w0.2: C35.1@82.566,40.792 83.362,40.403 C35.1@82.974,41.2 ; R45.1@92.499,40.209 92.111,39.413 R45.1@92.907,39.802
  TopLayer w0.3: C35.1@82.566,41.2 83.735,40.03 86.068,40.03 87.298,38.8 91.498,38.8 R45.1@92.898,40.201
  TopLayer w0.8: J9.3@81.78,44 81.78,41.986 C35.1@82.566,41.2 ; R45.1@92.898,40.201 R46.1@94.6,40.201
CMP1P2: C36.1 R47.1 R53.1 U2.18 | length 48.8
  TopLayer w0.2: U2.18@60.1,36.6 60.1,39.066 62.369,41.335 78.465,41.335 78.981,40.819 80.9,38.9 ; C36.1@82.321,38.779 81.559,38.9 C36.1@82.347,39.033 ; C36.1@82.347,38.608 80.9,38.9 ; C36.1@82.347,39.192 80.9,38.9 ; C36.1@82.388,38.312 83.184,37.923 C36.1@82.795,38.72 ; C36.1@82.566,38.9 80.9,38.9 ; R53.1@92.663,37.318 92.274,36.521 R53.1@93.071,36.91
  TopLayer w0.3: C36.1@82.566,38.9 82.566,38.541 83.439,37.668 86.436,37.668 88.004,36.1 91.853,36.1 R53.1@92.898,37.145
  TopLayer w0.8: R53.1@92.898,37.501 R47.1@94.6,37.501
CMP3M: C29.2 U2.29 | length 5
  TopLayer w0.2: C29.2@52.566,36.7 53.566,35.7 U2.29@55.2,35.7 ; C29.2@52.606,36.253 53.402,35.864 C29.2@52.8,36.8
EMFU: C8.1 D3.2 J9.1 R20.1 R35.1 | length 33.2
  TopLayer w0.4: 94.801,62.639 R35.1@94.866,62.9
  TopLayer w0.8: J9.1@76.7,44 76.7,45.3 81.9,50.5 92.7,50.5 94.801,52.601 94.801,58.199 94.801,62.639 R35.1@94.801,63.101
EMFV: C3.1 D2.2 J10.1 R22.1 R36.1 | length 28.4
  TopLayer w0.2: J10.1@58.071,44.483 59.3,45.3 J10.1@58.484,44.07
  TopLayer w0.5: J10.1@58,44 68.001,54.001 R22.1@68.001,57.799 68.001,60.054 D2.2@68.06,60.112
  TopLayer w0.8: D2.2@68.06,60.112 68.801,60.853 R36.1@68.801,62.901
  BottomLayer w1.3: 55.913,44 J10.1@58,44
EMFW: C2.1 D4.2 J11.1 R19.1 R37.1 | length 28.1
  TopLayer w0.4: R19.1@43.3,58.2 43.5,59 R19.1@43.7,58.2 ; D4.2@43.3,59.2 43.5,58.4 D4.2@43.7,59.2 ; D4.2@43.3,60.5 43.5,61.3 D4.2@43.7,60.5 ; R37.1@43.4,61.7 43.5,60.9 R37.1@43.7,61.7 ; R37.1@43.5,62.098 R37.1@43.5,62.164 ; C2.1@43.7,56.1 43.562,56.65 R19.1@43.7,57.2
  TopLayer w0.5: J11.1@40,44 40,53.1 42.4,55.5 C2.1@43.466,55.5 43.5,55.534 43.5,62.098 R37.1@43.601,62.199
FICED: J5.3 U2.17 | length 33.1
  TopLayer w0.2: U2.17@60.5,36.6 60.5,38.9 62.535,40.935 77.331,40.935 81.066,37.2 82.58,37.2 J5.3@83.78,36 ; J5.3@83.362,36.01 82.973,36.807 J5.3@83.769,36.418 ; J5.3@83.388,35.789 82.735,37.044 J5.3@84.049,36.424
FICEK: J5.2 U2.14 | length 25
  TopLayer w0.2: U2.14@62.2,35.7 63.1,35.7 67.935,40.535 77.165,40.535 79.51,38.19 79.51,37.73 J5.2@81.24,36 ; J5.2@80.794,36.038 80.406,36.834 J5.2@81.202,36.445
GND: C1.1 C2.2 C3.2 C4.2 C5.1 C6.1 C7.1 C8.2 C9.2 C10.2 C12.2 C13.2 C14.1 C15.2 C16.2 C17.2 C19.1 C20.2 C21.2 C22.2 C23.2 C24.2 C25.2 C26.2 C27.2 C28.2 C29.1 C30.2 C31.2 C32.2 C33.1 C34.1 C35.2 C36.2 C37.2 C38.2 C39.2 C40.2 C41.2 C43.1 C44.2 C46.2 C47.2 D1.1 D2.1 D3.1 D4.1 D5.1 Designator19.1 Designator19.2 J2.1 J3.5 J4.3 J5.4 J7.6 LED4.2 NTC1.2 R12.1 R15.2 R19.2 R20.2 R22.2 R33.2 R45.2 R53.2 R54.2 RS3.1 S1.2 S2.2 U1.3 U1.5 U2.0 U2.11 U2.16 U2.37 U2.52 U3.GND VR1.3 | length 269.3
  TopLayer w0.2: C44.2@46.034,33 C23.2@46.034,30.9 C15.2@46.034,28.8 47.224,27.61 49.708,27.61 50.166,28.068 C34.1@50.166,29.8 50.166,30.866 51.8,32.5 U2.37@55.2,32.5 v2@57.6,32.5 ; U2.52@59.7,29.6 59.7,28.3 61.1,26.9 62.8,26.9 63.734,25.966 C9.2@63.734,23.432 ; U2.0@60.856,34.5 U2.11@62.2,34.5 64.3,34.5 64.7,34.9 67.166,34.9 C41.2@68.266,36 ; U2.0@60.9,34.6 U2.16@60.9,36.6 60.9,38.4 62,39.5 ; C43.1@62.838,39.212 62,39.5 ; C43.1@62.838,39.788 62,39.5 ; C43.1@62.966,39.5 62,39.5 ; C9.2@63.766,23.4 66.1,23.4 67.1,22.4 D5.1@67.1,20.7 ; C26.2@68.366,33.8 C41.2@68.366,36 68.966,36.6 71.134,36.6 C19.1@72.434,35.3 ; C36.2@84.666,38.9 86.322,38.9 87.721,37.501 R53.2@90.798,37.501 ; C35.2@84.666,41.2 86.1,41.2 87.099,40.201 R45.2@90.798,40.201 ; 88.309,46.947 88.601,45.5 88.893,46.947
  TopLayer w0.4: C4.2@13.7,19.66 16.061,17.299 16.714,17.299 ; D1.1@21.6,3.1 27.9,3.1 30.2,5.4 C10.2@30.2,9.9 30.2,11.4 27.7,13.9 LED4.2@27.7,18.814
  TopLayer w0.5: RS3.1@27.7,50.8 27.7,52.7 27.3,53.1 24.5,53.1 23.6,52.2 23.6,44.1 29.763,37.937 37.896,37.937 C33.1@39.234,36.6 ; v1(45.601,50.201) R19.2@45.601,57.699 45.601,58.454 D4.1@47.06,59.912 ; R22.2@70.1,57.798 R22.2@70.101,57.799 71.56,59.257 ; v1(70.2,50.2) 70.2,57.898 71.56,59.257 ; D2.1@71.56,60.112 71.56,59.257 ; 83,49 94.1,49 96.8,51.7 R20.2@96.801,58.199 R20.2@96.801,58.199 98.26,59.657 D3.1@98.26,60.712 ; v1@88.6,48.6 88.601,48.599 R54.2@88.601,42.599
  TopLayer w0.8: C33.1@39.235,36.601 R33.2@41.498,36.601
  TopLayer w0.9: U1.3@11.7,12.44 v1(15.31,12.44) ; U1.5@11.7,14.98 14.396,14.98 16.714,17.299 R12.1@18.099,17.299 ; v1(46.1,21.5) C5.1@46.1,22.566 ; v1(48.4,21.5) C6.1@48.4,22.566 ; v1(50.7,21.468) C25.2@50.7,22.534 ; v1(53.1,21.5) C7.1@53.1,22.566 ; v1(55.5,21.468) C24.2@55.5,22.534
  BottomLayer w0.4: 86.7,16.5 100.49,30.29 NTC1.2@100.49,73.2
  other v1: 45.4,2.597 65.997,2.7 69.997,2.7 41.5,2.797 60.797,2.9 73.197,2.9 35.1,2.997 49.7,2.997 55.7,2.997 77.8,2.997 24.46,3.048 85.197,3.15 81.432,3.197 27.737,3.251 89.637,3.397 52.797,3.6 93.397,3.734 26.035,4.343 23.571,4.928 32.08,4.928 62,5.197 65.197,5.3 95.9,5.4 22.2,5.537 71.597,5.69 88.197,5.9 53.597,6.1 83.3,6.8 92.797,7.112 79.197,7.3 61.997,7.6 65.1,7.597 71.831,7.597 2.134,7.899 3.327,7.899 90.197,7.899 4.902,7.925 6.121,7.925 41.197,8.1 43.797,8.1 46.3,8.197 98.997,8.2 37.597,8.3 51.797,8.3 32.969,8.397 55.4,8.397 51.41,12.294 82.797,12.319 53.67,12.421 14.173,12.44 32.797,12.7 78.5,12.797 92.685,13.197 98.45,13.397 80.797,14.072 88.797,14.072 14.046,14.98 50.241,15.646 93.1,15.997 6.426,16.205 83.1,16.197 98.9,16.597 88.797,16.688 4.115,16.891 2.946,16.993 5.436,16.993 1.829,17.018 32.537,17.577 30.251,17.882 4.75,18.034 96,18.397 68,18.6 68.936,18.593 86.397,18.6 89.5,18.797 1.829,18.821 6.147,18.872 31.14,18.948 3.404,18.974 4.521,18.974 32.817,19.101 16.612,19.197 98.797,19.279 17.597,19.329 5.41,19.787 1.651,20.574 4.674,20.574 6.401,20.574 3.023,20.726 91.797,20.853 98.597,20.904 59.36,21.107 93.904,22.197 95.597,24.13 97.079,24.997 37.135,26.997 21.59,27.407 97.8,27.4 38,28 40.5,28.1 23.038,28.372 33.797,28.753 31.445,28.931 21.742,28.956 45.237,29.82 22.758,30.455 40.2,30.6 31.902,31.197 33.553,31.397 82,31.8 90,31.8 90.9,31.8 80.2,31.9 84,31.9 85.2,31.9 22.835,32.715 31.318,32.715 32.995,32.766 32.182,33.731 33.731,34.011 68.301,34.9 28.804,35.255 26.035,35.281 29.947,35.281 32.055,35.281 33.604,35.281 27.33,35.331 74.117,35.408 49.5,36.7 89.586,37.501 49.5,39 88.621,40.201 28.3,42.7 32.5,42.8 30.2,43 27.1,43.1 29.1,43.4 31.5,43.4 33.7,43.6 27.9,43.9 26.5,44.1 30.2,44.1 34.6,44.1 31,44.4 32.4,44.4 25.5,44.6 28.8,44.6 90.8,44.8 91.9,44.8 27.1,45 33.4,45.1 29.7,45.2 32.1,45.2 35.2,45.3 26,45.5 34.4,45.5 28.1,45.6 36.3,45.6 31,45.7 71.197,45.8 25.3,46 44.9,45.997 27.2,46.3 29,46.4 30.4,46.4 31.9,46.5 33.1,46.5 34.3,46.5 26.1,46.6 35.4,46.6 36.4,46.6 28.1,46.7 37.4,46.7 90.797,47.2 25.3,47.3 31,47.5 33.3,47.5 32.2,47.6 34.6,47.6 35.6,47.6 36.5,47.6 37.5,47.6 27,47.7 28,47.7 29,47.7 30,47.7 26,47.8 25.3,48.4 33.7,48.4 82.6,48.397 85.9,48.4 36.2,48.5 37.3,48.5 88.8,48.5 31,48.6 26.1,48.8 27,48.8 28,48.8 29,48.8 30,48.8 25.3,49.4 33.7,49.4 36.2,49.4 37.7,49.4 31,49.6 30.2,49.9 25.3,50.4 25.3,51.4 23.397,84.9 51.1,84.9 14.3,84.997 26,84.997 36.6,84.997 49,84.997 12.197,85.1 21.997,85.1 32.397,85.1 40.797,85.1 47.5,85.1 54.3,85.1 58.3,85.1 61.5,85.1 28.4,85.197 30.1,85.197 34.3,85.197 39.1,85.197 64.3,85.2 66,85.2 67.6,85.2 15.797,85.3 73.4,85.3 74.397,85.3
  other v2: 56.603,31.4 57.403,31.4 58.203,31.4 59.003,31.4 59.803,31.4 60.603,31.4 56.603,32.3 57.403,32.3 58.203,32.3 59.003,32.3 59.803,32.3 60.603,32.3 56.603,33.2 57.403,33.2 58.203,33.2 59.003,33.2 59.803,33.2 60.603,33.2 56.603,34.1 57.403,34.1 58.203,34.1 59.003,34.1 59.803,34.1 60.603,34.1 56.6,35 57.4,35 58.2,35 59,35 59.8,35 60.6,35
HALL_A: C7.2 R6.1 U2.43 | length 29.7
  TopLayer w0.2: R6.1@44.511,12.661 44.799,13.5 R6.1@45.087,12.661 ; C7.2@52.689,24.697 52.3,23.9 C7.2@53.097,24.289 ; C7.2@52.972,24.946 53.769,25.335 C7.2@53.38,24.538 ; C7.2@53.1,24.666 56.1,27.666 U2.43@56.1,29.6
  TopLayer w0.25: R6.1@44.799,12.399 44.799,17.599 45.8,18.6 47.975,18.6 49.3,19.925 51.424,19.925 51.9,20.401 51.9,23.466 C7.2@53.1,24.666
HALL_B: C6.2 R7.1 U2.40 | length 34.7
  TopLayer w0.2: R7.1@40.111,12.46 40.399,13.298 ; R7.1@40.112,12.761 40.4,13.6 R7.1@40.688,12.761 ; 40.399,13.298 R7.1@40.687,12.46 ; C6.2@48.061,24.735 47.672,23.938 C6.2@48.469,24.327 ; C6.2@48.355,25.029 49.152,25.418 C6.2@48.763,24.621 ; C6.2@48.4,24.666 49.534,25.8 51.266,25.8 53.6,28.134 53.6,30.634 54.266,31.3 U2.40@55.2,31.3
  TopLayer w0.25: R7.1@40.399,12.399 40.399,15.599 44.75,19.95 46.45,19.95 47.2,20.7 47.2,23.466 C6.2@48.4,24.666
HALL_C: C5.2 R8.1 U2.39 | length 35.8
  TopLayer w0.2: R8.1@35.8,12.7 36.837,13.236 R8.1@36.448,12.44 ; C5.2@45.648,24.621 45.259,23.825 C5.2@46.3,24.4 ; C5.2@46.083,25.056 46.879,25.445 C5.2@46.49,24.649 ; C5.2@46.1,24.666 47.634,26.2 51.1,26.2 53.2,28.3 53.2,30.8 54.1,31.7 U2.39@55.2,31.7
  TopLayer w0.25: R8.1@35.999,12.399 44.4,20.799 44.4,22.966 C5.2@46.1,24.666
HOU: R23.1 U2.2 | length 111.9
  TopLayer w0.2: U2.2@62.2,30.9 63.14,30.9 64.4,29.64 64.4,29.066 68.566,24.9 72.009,24.9 ; 72.009,24.779 71.247,24.9 72.034,25.033 ; v1@97.775,34.448 97.386,33.651 v1@98.182,34.04
  TopLayer w0.5: 72.009,24.9 72.6,24.9 73.1,24.4 88.135,24.4 94.017,30.283 ; 89.3,25.565 94.017,30.283 ; v1(98.035,34.3) 94.017,30.283
  TopLayer w0.8: R23.1@70.698,67.601 v1(71.999,67.601)
  BottomLayer w0.6: v1@72.1,67.5 72.5,67.1 95.79,67.1 98.035,64.855 v1(98.035,34.3)
HOV: R27.1 U2.5 | length 121.2
  TopLayer w0.2: U2.5@62.2,32.1 63.637,32.1 67.437,28.3 70.1,28.3 ; 95.004,34.148 v1@95.801,34.536 ; 95.004,34.148 v1@95.393,34.944
  TopLayer w0.3: 70.1,28.3 72.1,28.3 72.3,28.1 88.956,28.1 v1(95.656,34.8)
  TopLayer w0.8: v1(44.799,66.501) R27.1@44.799,67.901
  BottomLayer w0.6: v1(44.799,66.501) 46.6,64.7 93.364,64.7 95.656,62.408 v1(95.656,34.8)
HOW: R28.1 U2.8 | length 137.1
  TopLayer w0.2: U2.8@62.2,33.3 64.134,33.3 65.934,31.5 68.2,31.5 ; v1@92.978,35.968 92.589,35.171 v1@93.386,35.56
  TopLayer w0.3: 68.2,31.5 75.6,31.5 76.2,32.1 76.2,34.2 76.747,34.747 92.165,34.747 v1(93.218,35.8)
  TopLayer w0.8: v1(21.3,66.4) R28.1@21.299,67.801
  BottomLayer w0.6: v1(21.3,66.4) 25.7,62 91.899,62 93.218,60.681 v1(93.218,35.8)
HU: J3.2 R5.1 R6.2 | length 6.8
  TopLayer w0.6: R6.2@44.799,10.299 R5.1@46.998,10.299 ; J3.2@45,5.51 R6.2@45,10.098
HV: J3.3 R4.1 R7.2 | length 6.9
  TopLayer w0.6: R7.2@40.402,10.301 R4.1@42.601,10.301 ; J3.3@42.5,5.5 R4.1@42.5,10.201
HW: J3.4 R3.1 R8.2 | length 7.7
  TopLayer w0.6: R8.2@36.002,10.301 R3.1@38.201,10.301 40,8.502 J3.4@40,5.5
I_SHUNT: C18.1 C33.2 C42.1 Q6.3 R41.2 R50.1 R55.2 R57.2 RS1.1 RS2.1 RS3.2 | length 79.1
  TopLayer w0.2: R55.2@36.846,34.762 37.134,35.6 R55.2@37.422,34.762 ; C33.2@36.846,36.038 37.134,35.2 ; 37.134,35.2 C33.2@37.422,36.038
  TopLayer w0.4: C33.2@36.69,36.3 35.89,36.5 C33.2@36.69,36.7 ; R41.2@52.7,57.239 52.9,58.039 R41.2@53.1,57.239 ; C42.1@52.7,58.356 52.9,57.556 C42.1@53.1,58.356 ; 58.9,58.4 59.1,59.2 59.3,58.4 ; R57.2@78.101,57.3 78.301,58.1 R57.2@78.501,57.3 ; C18.1@78.101,58.7 78.301,57.9 C18.1@78.501,58.7 ; 87.4,58.7 87.6,59.5 87.8,58.7
  TopLayer w0.5: RS3.2@27.7,56.996 27.7,54.7 27,54 24.1,54 22.5,52.4 22.5,43.7 29.7,36.5 C33.2@37.034,36.5 ; C33.2@37.134,36.6 37.134,34.265 R55.2@37.198,34.201 ; R41.2@52.9,56.896 C42.1@52.9,58.766 53.734,59.6 58.7,59.6 59.1,59.2 RS2.1@59.1,57 ; R57.2@78.301,56.901 C18.1@78.301,58.767 ; C18.1@78.301,58.965 C18.1@78.301,58.767 ; C18.1@78.3,58.966 79.234,59.9 87.2,59.9 87.6,59.5 RS1.1@87.6,57.2 87.6,59 ; C18.1@78.4,58.866 C18.1@78.301,58.767
  other v1: 89.5,52.5 80.8,52.6 81.6,52.6 82.4,52.6 83.2,52.6 84,52.6 84.9,52.597 86.1,52.6 87,52.6 88.4,52.6 90.6,52.597 91.6,52.597 54.5,52.8 55.4,52.8 56.3,52.8 57.2,52.8 58.1,52.8 59,52.8 59.9,52.797 60.9,52.797 61.797,52.8 62.9,52.8 63.797,52.9 86.1,53.4 87,53.4 87.8,53.4 88.8,53.4 89.7,53.4 91.6,53.397 90.797,53.5 80.7,53.6 81.5,53.6 82.3,53.6 83.1,53.6 84,53.6 84.9,53.597 62.8,53.7 54.6,53.797 55.397,53.8 56.197,53.8 57.2,53.797 58,53.8 58.9,53.797 59.8,53.797 60.7,53.797 61.6,53.9 63.797,53.9 30.5,53.997 31.7,53.997 32.9,53.997 33.9,53.997 34.8,53.997 35.7,53.997 36.6,53.997 37.5,53.997 38.397,54 86.1,54.3 86.9,54.3 87.8,54.3 88.8,54.3 89.7,54.3 90.6,54.3 91.6,54.3 84.9,54.597 80.7,54.6 81.6,54.6 82.4,54.6 83.2,54.6 84,54.6 62.8,54.7 54.597,54.9 55.397,54.9 56.197,54.9 61.8,54.9 63.797,54.9 57.197,55 58,54.997 58.9,55 59.8,55 60.7,55 30.5,55.197 31.7,55.197 32.9,55.197 33.9,55.197 34.797,55.2 35.7,55.197 36.6,55.197 37.5,55.197 38.397,55.2 85.997,55.2 86.9,55.2 87.8,55.2 88.8,55.2 89.7,55.2 90.6,55.2 91.5,55.2 83.2,55.4 84,55.4 80.8,55.5 81.6,55.5 82.4,55.5 84.9,55.5 61.997,55.7 62.997,55.7 54.6,55.797 55.4,55.797 56.2,55.797 63.9,55.797 91.7,55.997 89.997,56.1 90.797,56.1 30.5,56.3 31.7,56.297 32.9,56.297 33.9,56.297 34.8,56.297 35.7,56.297 36.6,56.297 37.5,56.297 38.397,56.3 61.397,56.3 80.8,56.3 81.6,56.3 82.4,56.4 83.2,56.4 84,56.4 84.9,56.4 62.997,56.5 54.597,56.7 55.397,56.7 56.197,56.7 62.197,56.7 64,56.797 90.197,56.9 90.997,56.9 91.797,56.9 80.8,57.2 30.5,57.3 31.7,57.297 32.9,57.297 33.9,57.297 34.8,57.297 35.7,57.297 36.6,57.297 37.5,57.297 38.397,57.3 81.6,57.3 82.4,57.3 83.2,57.3 84,57.3 84.9,57.3 63.3,57.397 62.397,57.5 55.397,57.594 54.597,57.6 56.203,57.597 90.197,57.7 90.997,57.7 91.797,57.7 61.5,57.797 63.1,58.197 63.9,58.197 80.8,58.2 81.6,58.2 82.4,58.2 83.2,58.2 84,58.2 84.9,58.2 30.5,58.4 31.7,58.397 32.9,58.397 33.9,58.397 34.8,58.397 35.7,58.397 36.6,58.397 37.5,58.397 38.397,58.4 62.1,58.5 90.197,58.7 90.997,58.7 91.797,58.7 60.797,58.9 63.597,59 61.7,59.197 62.797,59.2 30.5,59.4 31.7,59.397 32.9,59.397 33.9,59.397 34.8,59.397 35.7,59.397 36.6,59.397 37.5,59.397 38.397,59.4 31.7,60.397 32.9,60.397 33.9,60.397 34.8,60.397 35.7,60.397 36.6,60.397 37.5,60.397 38.397,60.4
IU+: C18.2 Q2.3 R26.1 R39.2 RS1.2 | length 24.9
  TopLayer w0.4: R39.2@75.901,57.3 76.101,58.1 R39.2@76.301,57.3 ; C18.2@77.9,60.866 77.1,61.066 C18.2@77.9,61.266 ; C18.2@78.9,60.866 79.7,61.066 C18.2@78.9,61.266 ; RS1.2@87.4,62.3 87.6,61.5 RS1.2@87.8,62.3
  TopLayer w0.5: R39.2@76.101,56.901 76.101,60.401 76.766,61.066 C18.2@78.3,61.066 87.166,61.066 87.6,61.5 RS1.2@87.6,63.396
  TopLayer w0.6: Q2.3@86.54,73.7 Q2.3@87.24,74.4
IV+: C42.2 Q4.3 R32.1 R43.2 RS2.2 | length 20.7
  TopLayer w0.4: R43.2@50.401,57.315 50.601,58.115 R43.2@50.801,57.315 ; 52.217,60.666 51.417,60.866 52.217,61.066 ; C42.2@53.505,60.666 54.305,60.866 C42.2@53.505,61.066 ; RS2.2@58.9,62.096 59.1,61.296 RS2.2@59.3,62.096
  TopLayer w0.5: R43.2@50.601,56.901 50.601,60.05 51.417,60.866 C42.2@52.9,60.866 58.67,60.866 59.1,61.296 RS2.2@59.1,63.196
K-DOWN: C25.1 J12.1 S2.1 U2.41 | length 98.8
  TopLayer w0.2: v1@43.112,14.861 43.123,14.895 43.4,15.699 43.677,14.895 v1@43.688,14.861 ; v1@49.9,23.9 C25.1@50.697,24.289 ; v1@49.9,23.9 C25.1@50.289,24.697 ; C25.1@50.646,24.953 51.442,25.342 C25.1@51.053,24.546 ; C25.1@50.7,24.634 50.734,24.634 54,27.9 54,30.469 54.431,30.9 U2.41@55.2,30.9
  TopLayer w0.25: v1(43.4,14.8) 43.4,15.699 43.4,17.5 45.1,19.2 47.8,19.2 49.5,20.9 49.5,23.434 C25.1@50.7,24.634
  TopLayer w1: S2.1@85.25,7.63 S2.1@85.25,16.37
  BottomLayer w0.25: v1@43.312,14.526 44.265,13.935 v1@43.693,14.857 ; v1@85.079,9.577 84.023,9.825 v1@85.115,10.08
  BottomLayer w0.3: v1(43.4,14.8) 44.8,13.4 55.9,13.4 59.475,9.825 v1(85.25,9.825)
  BottomLayer w0.5: J12.1@38.3,21.5 39.6,20.2 41.869,20.2 45.335,23.665 v1(49.731,23.665)
K-UP: C24.1 S1.1 U2.44 | length 94.1
  TopLayer w0.2: v1@47.712,14.461 47.723,14.495 48,15.299 ; v1(48,14.4) 48,15.299 ; v1@48.288,14.461 48.277,14.495 48,15.299 ; C24.1@55.143,24.685 54.755,23.888 C24.1@55.551,24.277 ; C24.1@55.212,24.862 55.5,25.7 C24.1@55.788,24.862 ; U2.44@56.5,29.6 56.5,27 55.5,26 C24.1@55.5,24.634 54.3,23.434 54.3,20.2 53.6,19.5 49.8,19.5 48,17.7 48,15.299
  TopLayer w1: S1.1@101.25,7.63 S1.1@101.25,16.37
  BottomLayer w0.25: v1@48.083,14.145 49.174,14.4 v1@48.118,14.648 ; v1@101.208,10.652 100.152,10.9 v1@101.244,11.155
  BottomLayer w0.3: v1(48,14.4) 56.175,14.4 59.675,10.9 v1(101.25,10.9)